# Altium PCB MainShunt.PcbDoc
Units mm, origin at the board's own origin, x right, y up, seen from the top; angles counter-clockwise.
Board outline 50 x 100.04 mm, 2 copper layers (Top Layer, Bottom Layer); 17 components, 7 nets, 145 pads, 16 vias.
Unrouted connection lines stored in the file: 106.
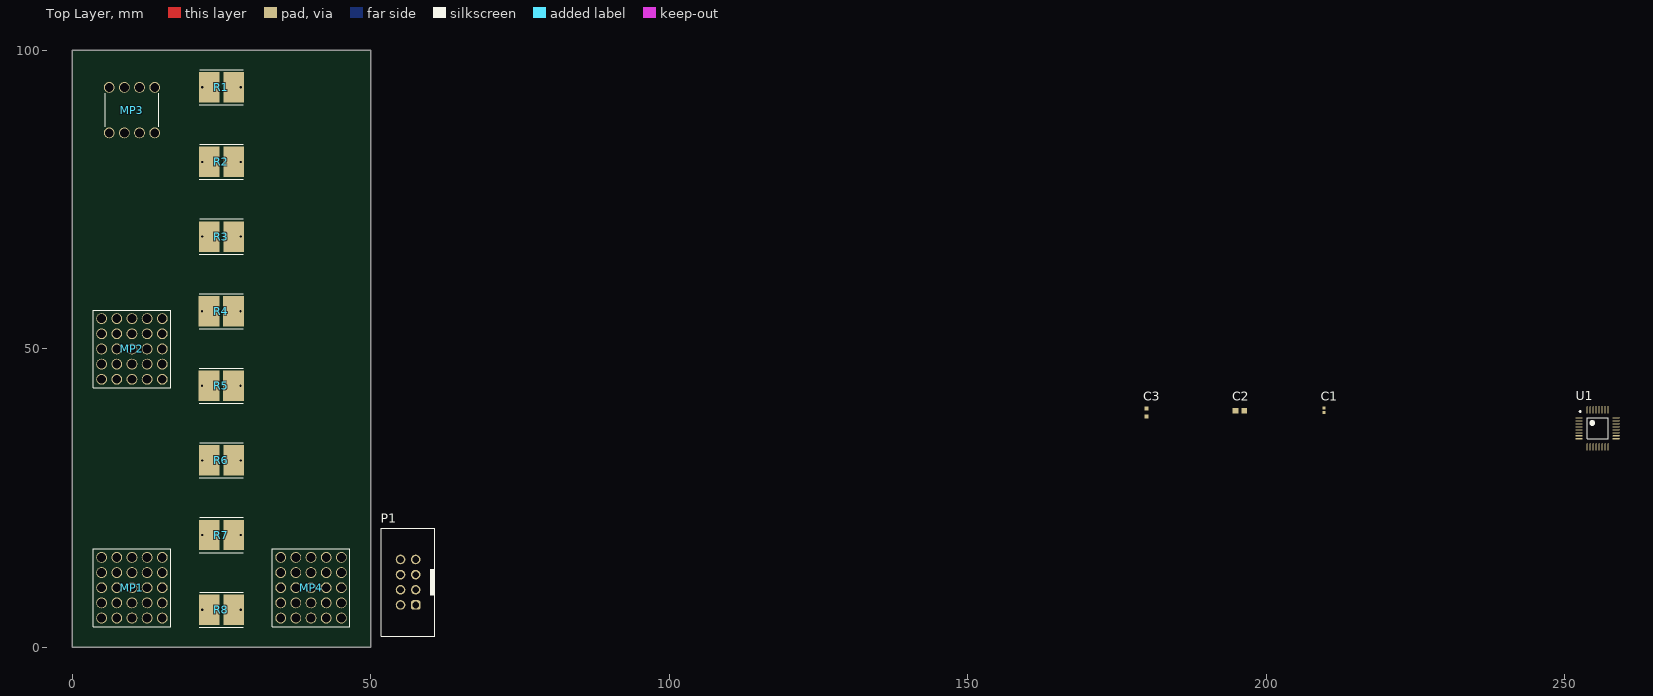
[diagram p0: Top Layer view]
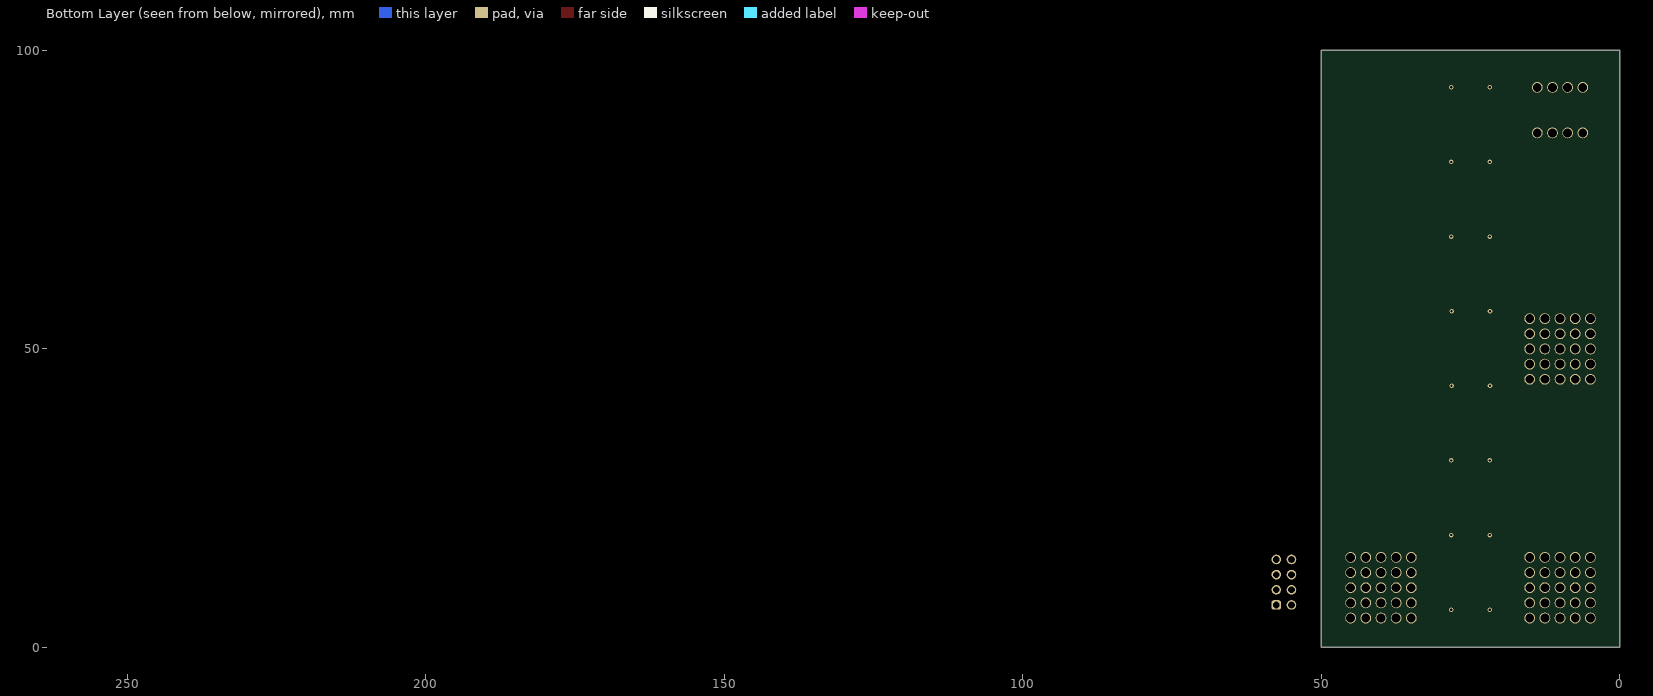
[diagram p1: Bottom Layer view, seen from below]

## Layer stack, top to bottom
Top Solder: solder mask 0.0102, Solder Resist, Dk 3.5
Top Layer: signal copper 0.07
Dielectric 1: dielectric 0.32, FR-4, Dk 4.8
Bottom Layer: signal copper 0.07
Bottom Solder: solder mask 0.0102, Solder Resist, Dk 3.5

## Board outline
0,0 50.004,0 50.004,100.036 0,100.036

## Design rules (kind name [scope] priority, off if disabled: settings)
Clearance [All] p1: gap=0.254 ignorepadtopadclearanceinfootprint=FALSE except(0: Arc-Hole Track-Hole SMDPad-Hole THPad-Hole Via-Hole Fill-Hole Poly-Hole Region-Hole Text-Hole)
PolygonConnect [All] p1: connectstyle=Relief reliefconductorwidth=0.254 reliefentries=4 polygonreliefangle="90 Angle" airgapwidth=0.254
RoutingVias [All] p1: holewidth=0.711 width=1.27 viastyle="Through Hole" minholewidth=0.711 minwidth=1.27 maxholewidth=0.711 maxwidth=1.27
SolderMaskExpansion [All] p1: expansion=0.102 istentingtop=FALSE
Width [All] p1: maxlimit=0.254 minlimit=0.254 preferedwidth=0.254
30 further rules are at their usual default settings.

## Components (designator, comment, footprint, x,y, rotation, side; value= is the part's Value field where it differs from the comment)
C1 "100nF, 25v, X5R, 0402" FP-GRM155-0_05-IPC_C 209.677,39.751 r90 top
C2 "220nF 25V, X7R, 0603" FP-GCM188-0_1-IPC_B 195.58,39.624 r0 top
C3 "2.2uF, 25V, X5R, 0603" FP-GRM188-0_1-E0_2_0_5-MFG 179.959,39.37 r90 top
MP1 "7460307" "7461099_chemical surface" 10,10 r0 top
MP2 "7460307" "7461099_chemical surface" 10,50 r0 top
MP3 "7460307" "7460307_chemical surface" 10,90 r0 top
MP4 "7460307" "7461099_chemical surface" 40,10 r0 top
P1 "61200821621" 61200821621 56.261,10.922 r90 top
R1 "2mOhm 1%, 2818" FP-WSHP2818-MFG 24.998,93.829 r0 top
R2 "2mOhm 1%, 2818" FP-WSHP2818-MFG 24.998,81.329 r0 top
R3 "2mOhm 1%, 2818" FP-WSHP2818-MFG 24.998,68.829 r0 top
R4 "2mOhm 1%, 2818" FP-WSHP2818-MFG 24.96,56.329 r0 top
R5 "2mOhm 1%, 2818" FP-WSHP2818-MFG 24.96,43.829 r0 top
R6 "2mOhm 1%, 2818" FP-WSHP2818-MFG 24.998,31.329 r0 top
R7 "2mOhm 1%, 2818" FP-WSHP2818-MFG 24.998,18.829 r0 top
R8 "2mOhm 1%, 2818" FP-WSHP2818-MFG 24.998,6.329 r0 top
U1 "ADS131M08IPBS" FP-PBS0032A-IPC_C 255.524,36.703 r0 top

## Footprints (in the part's own frame and the unit in brackets; to place one, negate y for a bottom-side part, rotate by r counter-clockwise, add the part's x,y. Pads: shape width x height; smd on the part's side, far side on the other; paste and mask are expansions set on the pad)
"7460307_chemical surface" [mm] "WP-BUTR Bushes with two Rows Pin-Plate, M4, blind thr 6mm"
  round 1.8 hole 1.475: 1(-3.81,-3.81) 1(-3.81,3.81) 1(-1.27,-3.81) 1(-1.27,3.81) 1(1.27,-3.81) 1(1.27,3.81) 1(3.81,-3.81) 1(3.81,3.81)
  silkscreen extent -4.5,-2.8 4.5,2.8, body extent -4.5,-4.5 4.5,4.5, height 7
"7461099_chemical surface" [mm] "M8, blind 8mm"
  round 1.8 hole 1.475: 1(-5.08,-5.08) 1(-5.08,-2.54) 1(-5.08,0) 1(-5.08,2.54) 1(-5.08,5.08) 1(-2.54,-5.08) 1(-2.54,-2.54) 1(-2.54,0) 1(-2.54,2.54) 1(-2.54,5.08) 1(0,-5.08) 1(0,-2.54) 1(0,0) 1(0,2.54) 1(0,5.08) 1(2.54,-5.08) 1(2.54,-2.54) 1(2.54,0) 1(2.54,2.54) 1(2.54,5.08) 1(5.08,-5.08) 1(5.08,-2.54) 1(5.08,0) 1(5.08,2.54) 1(5.08,5.08)
  silkscreen extent -6.5,-6.5 6.5,6.5, body extent -6.5,-6.5 6.5,6.5, height 13.5
61200821621 [mm] "8 pins, straight, gold plating"
  rrect50% 1.6x1.6 hole 1.1: 1(-3.81,-1.27)
  round 1.6 hole 1.1: 2(-3.81,1.27) 3(-1.27,-1.27) 4(-1.27,1.27) 5(1.27,-1.27) 6(1.27,1.27) 7(3.81,-1.27) 8(3.81,1.27)
  silkscreen extent -9.01,-4.5 9.01,4.5, body extent -8.91,-4.42 8.91,4.75, height 9.13
FP-GCM188-0_1-IPC_B [mm]
  rect 0.959x0.912 smd paste+0 mask+0: 1(-0.727,0) 2(0.727,0)
  body extent -1.46,-0.71 1.46,0.71, height 0.25
FP-GRM155-0_05-IPC_C [mm]
  rect 0.515x0.472 smd paste+0 mask+0: 1(-0.379,0) 2(0.379,0)
  body extent -0.74,-0.38 0.74,0.38, height 0.25
FP-GRM188-0_1-E0_2_0_5-MFG [mm]
  rect 0.65x0.7 smd paste+0 mask+0: 1(-0.675,0) 2(0.675,0)
  body extent -1.1,-0.55 1.1,0.55, height 0.25
FP-PBS0032A-IPC_C [mm]
  rect 1.209x0.183 smd paste+0 mask+0: 1(-3.102,1.75)
  rrect100% 1.209x0.183 smd paste+0 mask+0: 2(-3.102,1.25) 3(-3.102,0.75) 4(-3.102,0.25) 5(-3.102,-0.25) 6(-3.102,-0.75) 7(-3.102,-1.25) 8(-3.102,-1.75) 17(3.102,-1.75) 18(3.102,-1.25) 19(3.102,-0.75) 20(3.102,-0.25) 21(3.102,0.25) 22(3.102,0.75) 23(3.102,1.25) 24(3.102,1.75)
  rrect100% 0.183x1.209 smd paste+0 mask+0: 9(-1.75,-3.102) 10(-1.25,-3.102) 11(-0.75,-3.102) 12(-0.25,-3.102) 13(0.25,-3.102) 14(0.75,-3.102) 15(1.25,-3.102) 16(1.75,-3.102) 25(1.75,3.102) 26(1.25,3.102) 27(0.75,3.102) 28(0.25,3.102) 29(-0.25,3.102) 30(-0.75,3.102) 31(-1.25,3.102) 32(-1.75,3.102)
  silkscreen extent -3.05,-1.75 1.75,2.92
FP-WSHP2818-MFG [mm]
  rect 3.5x5.1 smd paste+0 mask+0: 1(-2.055,0) 2(2.055,0)
  silkscreen extent -3.69,-2.94 3.67,2.95, body extent -3.91,-2.65 3.91,2.65, height 0.25

## Part data
C1: library part CMP-06035-003661-1, "Chip Multilayer Ceramic Capacitors for General Purpose, 0402, 0.10uF, X7R, 15%, 10%, 25V", Capacitance=100nF, Case Code (Imperial)=0402, Case Code (Metric)=1005, Dielectric=X7R, Dielectric Material=Ceramic, Max Operating Temperature=125°C, Min Operating Temperature=-55°C, Package Quantity=10000, Tolerance=10%, Voltage=25V, Case/Package=0402, Depth=0.5mm, Height=0.5mm, Lead Free="Lead Free", Length=1mm, Mount="Surface Mount", Packaging="Tape and Reel", Resistor Type=Ceramic, Termination=SMD/SMT, Thickness=0.022inch, Voltage Rating=25V, Voltage Rating (DC)=25V, Weight=0.000212oz, Width=0.02inch
C2: library part CMP-2006-02366-2, "Ceramic Capacitor for Automotive 220nF  ±10% 25VDC X7R 0603 Paper T/R", Capacitance=220nF, Case Code (Imperial)=0603, Case Code (Metric)=1608, Dielectric=X7R, Max Operating Temperature=125°C, Min Operating Temperature=-55°C, Package Quantity=1, Ratings=AEC-Q200, Tolerance=10%, Voltage=25V, Case/Package=0603, Depth=0.8mm, Height=0.8mm, Lead Free="Lead Free", Length=1.6mm, Mount="Surface Mount", Packaging="Tape and Reel", Radiation Hardening=No, Termination=SMD/SMT, Thickness=0.035inch, Voltage Rating=25V, Voltage Rating (DC)=25V, Width=0.031inch
C3: library part CMP-2006-02820-2, "Chip Multilayer Ceramic Capacitors for General Purpose, 0603, 2.2uF, X5R, 15%, 10%, 25V", Capacitance=2.2uF, Case Code (Imperial)=0603, Case Code (Metric)=1608, Dielectric=X5R, Max Operating Temperature=85°C, Min Operating Temperature=-55°C, Package Quantity=4000, Resistor Type=Ceramic, Tolerance=10%, Voltage=25V, Case/Package=0603, Depth=0.8mm, Height=0.8mm, Lead Free="Lead Free", Length=1.6mm, Material=Ceramic, Mount="Surface Mount", Number of Pins=2, Packaging="Tape and Reel", Radiation Hardening=No, REACH SVHC="No SVHC", Termination=SMD/SMT, Thickness=0.035inch, Voltage Rating=25V, Voltage Rating (DC)=25V, Weight=0.000222oz, Width=0.8mm
MP1 MP2 MP3 MP4: library part CMP-03913-18187384-1, "7460307 8 Pin Power Element, Copper Zinc Alloy, 160A, M4, Vertical", Current Rating=160A, Max Operating Temperature=150°C, Min Operating Temperature=-55°C, Contact Material=Copper, Contact Plating=Tin, Height=10.5mm, Insulation=Non-Insulated, Length=9mm, Material=Brass, Mount="Through Hole", NexarPartId=18187384, Number of Contacts=8, Number of Pins=8, Number of Rows=2, Packaging=Bulk, REACH SVHC=Unknown, RoHS=Compliant, Termination=Press-Fit, Thread Size=M4, Width=9mm
P1: library part CMP-1502-00006-2, Color=Black, Contact Resistance=20mΩ, Current Rating=3A, Insulation Resistance=1GΩ, Max Operating Temperature=105°C, Min Operating Temperature=-40°C, Operating Supply Voltage=250V, Connector Type="Male Pin", Contact Material=Copper, Contact Plating=Gold, Gender=Male, Insulation Material=PBT, Lead Pitch=2.54mm, Length=17.82mm, Mount="Through Hole", NexarPartId=32855460, Number of Contacts=8, Number of Pins=8, Number of Positions=8, Number of Rows=2, Orientation=Vertical, Pitch=2.54mm, REACH SVHC=Unknown, RoHS=Compliant, Row Spacing=2.54mm, Termination=Solder
R1 R2 R3 R4 R5 R6 R7 R8: library part CMP-00030-78727543-1, "WSHP28182L000FEB Res Metal Strip 2818 0.002 Ohm 1% 10W ±200ppm/C Pad SMD Automotive T/R", Case/Package=2818, Max Operating Temperature=170°C, Min Operating Temperature=-65°C, Power Rating=10W, Resistance=2mΩ, Temperature Coefficient=200ppm/°C, Tolerance=1%, Composition="Metal Element", Height=3.43mm, NexarPartId=78727543, Packaging="Cut Tape", RoHS=Non-Compliant, Schedule B="8533210045, 8533210045"
U1: library part CMP-04860-000022-1, "8 CHANNEL 24 BIT SIMULTANEOUS SA"

## Via types
v1: diameter 0.762, hole 0.381, Top Layer to Bottom Layer, 16 vias

## Nets (pads, with @x,y where several pads share a name; then routed paths per layer and width w, separated by ;. In a path a pad name is that pad's centre, name@x,y a point inside that pad or via, vN(x,y) a via of type N, cw(c..) or ccw(c..) an arc to the next point about the centre after c; other vN are vias at no path point)
5V: P1.7 P1.8
GND: C1.2 C2.2 C3.2 P1.1 P1.2
NetMP1_1: MP1.1 MP2.1 R1.1 R2.1 R3.1 R4.1 R5.1 R6.1 R7.1 R8.1
  other v1: 21.776,6.329 21.776,18.829 21.776,31.329 21.738,43.829 21.738,56.329 21.776,68.829 21.776,81.329 21.776,93.829
NetMP3_1: MP3.1 MP4.1 R1.2 R2.2 R3.2 R4.2 R5.2 R6.2 R7.2 R8.2
  other v1: 28.218,6.329 28.218,18.829 28.218,31.329 28.18,43.829 28.18,56.329 28.218,68.829 28.218,81.329 28.218,93.829
SCL-MOSI: P1.5 P1.6
SDA-MOSI: P1.3 P1.4
Vcc: C1.1 C2.1 C3.1
pads on no net: U1.1 U1.2 U1.3 U1.4 U1.5 U1.6 U1.7 U1.8 U1.9 U1.10 U1.11 U1.12 U1.13 U1.14 U1.15 U1.16 U1.17 U1.18 U1.19 U1.20 U1.21 U1.22 U1.23 U1.24 U1.25 U1.26 U1.27 U1.28 U1.29 U1.30 U1.31 U1.32

## Silkscreen, mask and mechanical layers (free items; w line width, h text height)
Mechanical 1:
  lines w0.254: 0,0 50,0 50,100 0,100 0,0